# Altium PCB PCB1.PcbDoc (part 4 of 4)
Units mm, origin at the board's own origin, x right, y up, seen from the top; angles counter-clockwise.
Board outline 49 x 49 mm, 8 copper layers (L1(SIG), L2(GND), L3(SIG), L4(GND), L5(PWR), L6(PWR), L7(GND), L8(SIG)), stack 1.6 mm thick; 175 components, 123 nets, 646 pads, 355 vias.
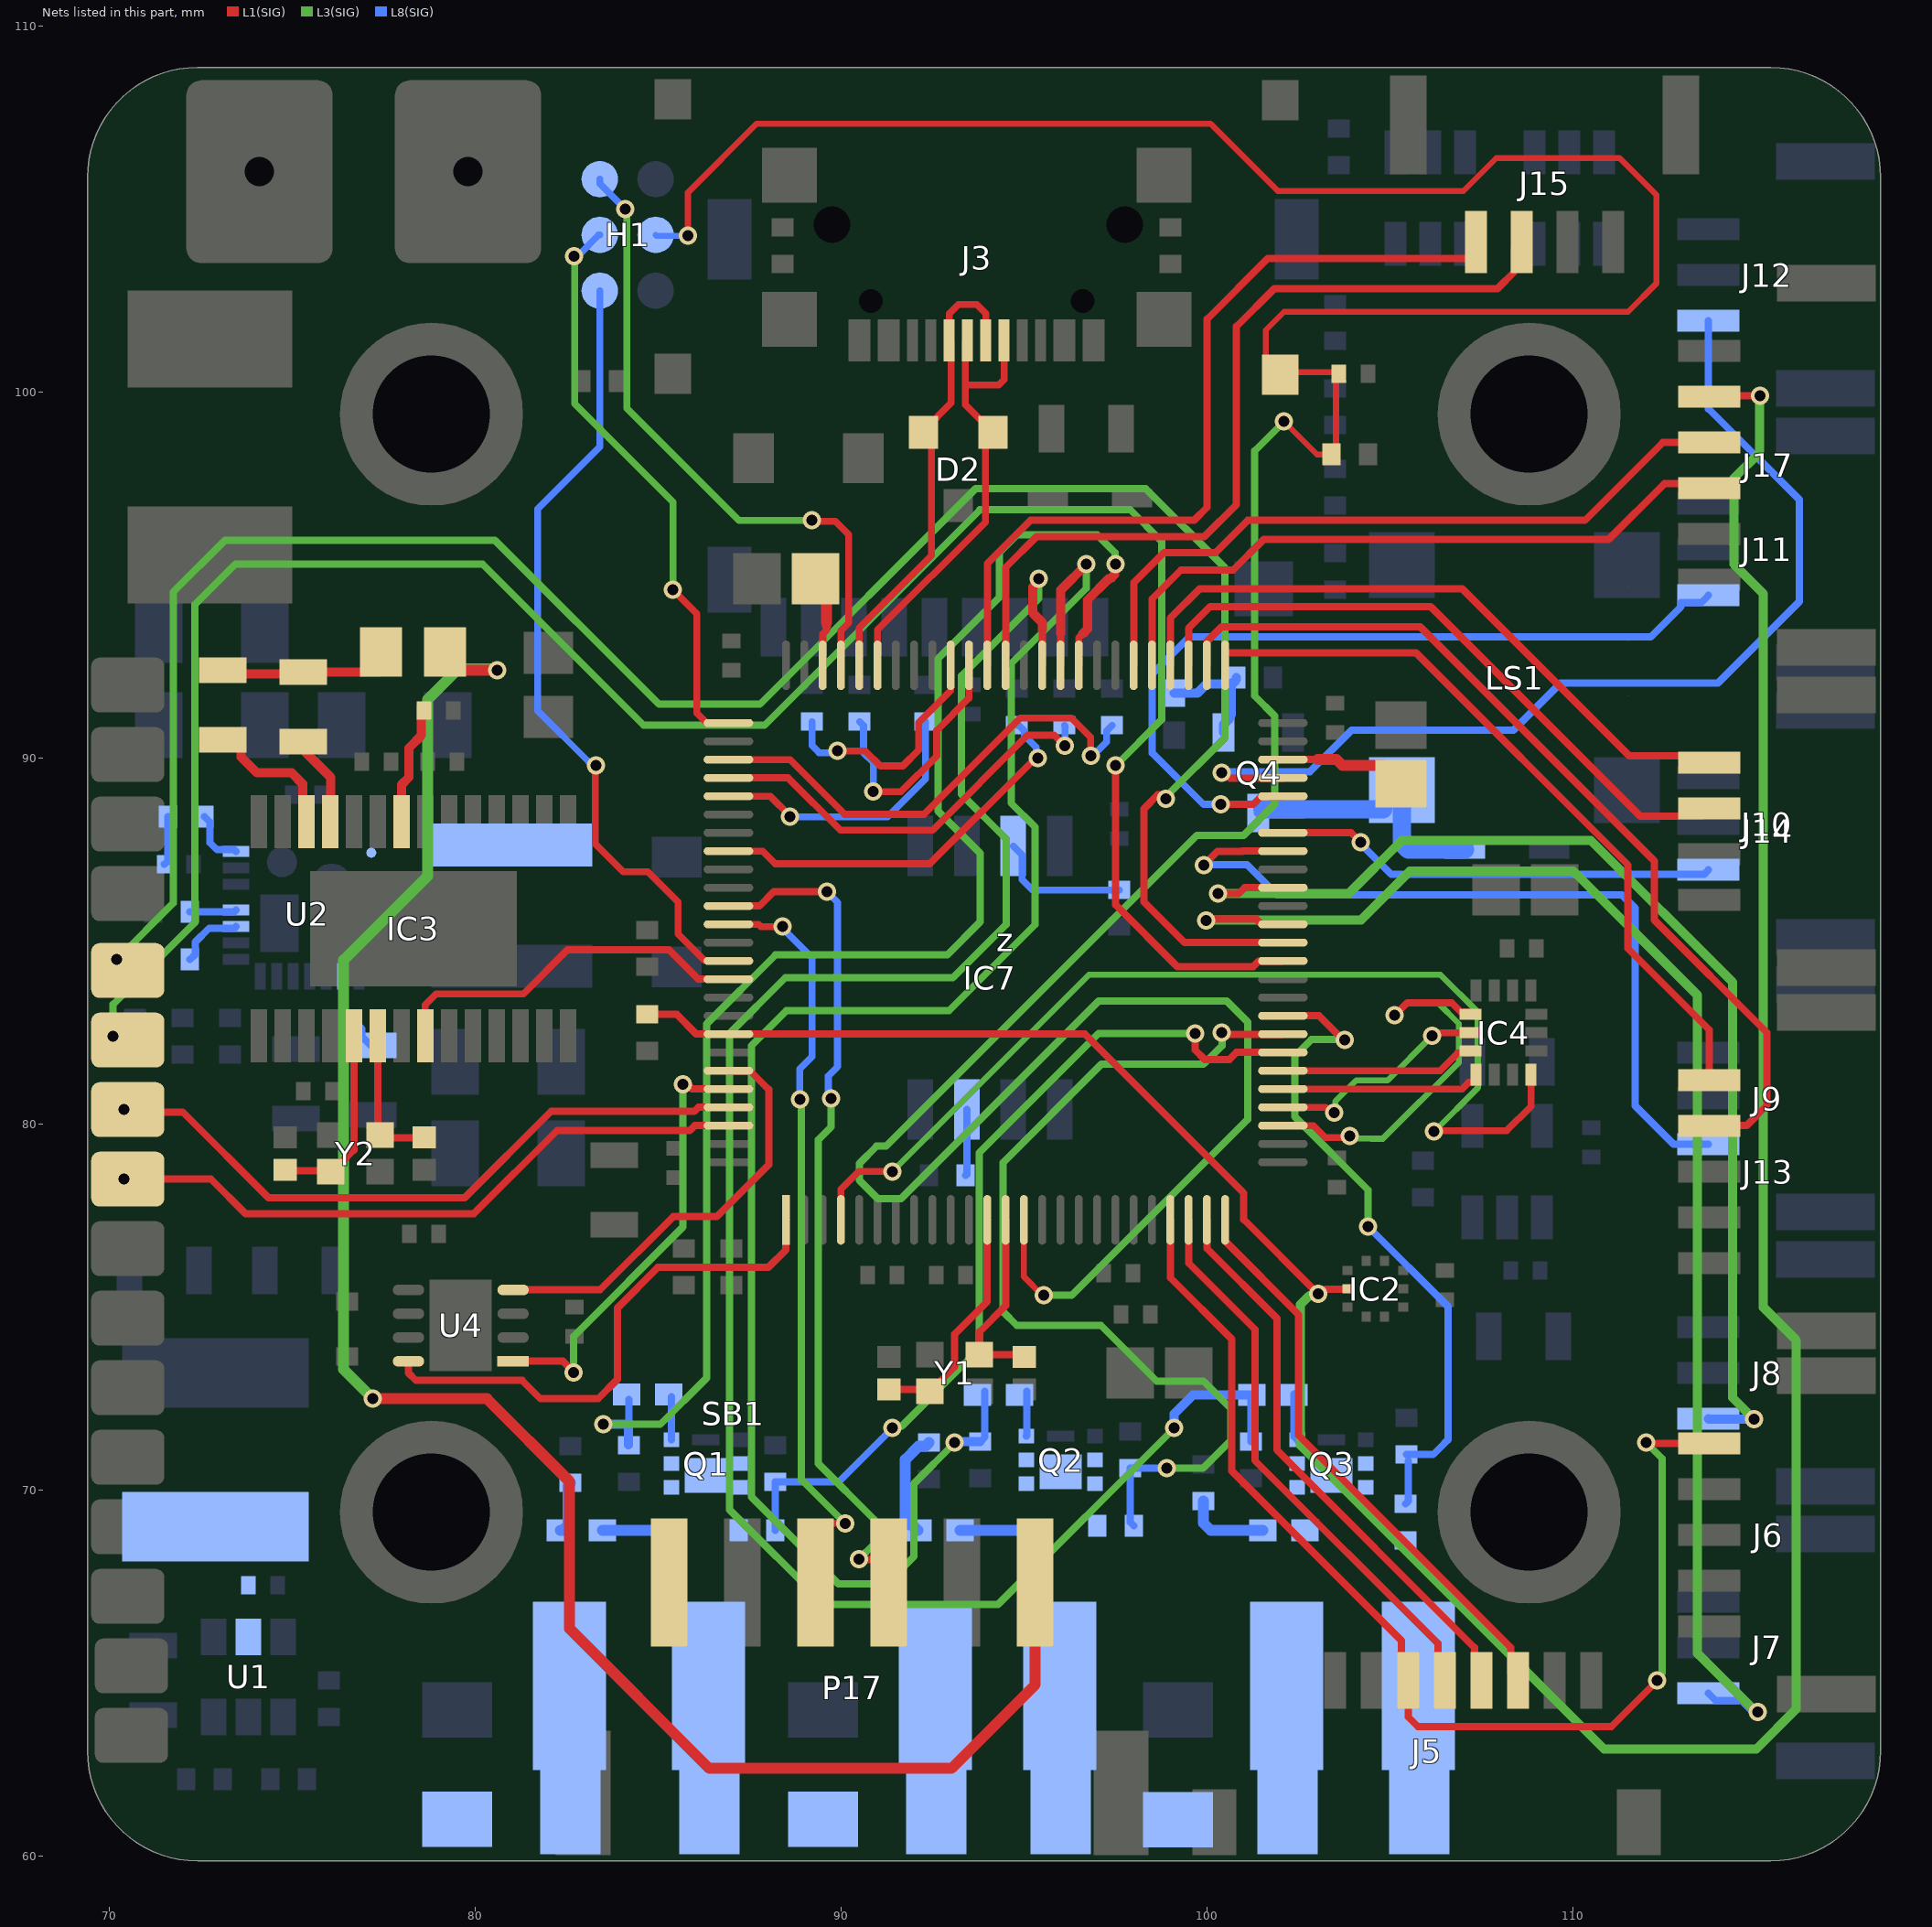
[diagram p9: the nets of this part, all layers, seen from the top]

## Via types
v1: diameter 0.5, hole 0.3, L1(SIG) to L8(SIG), tented both sides, 353 vias
v2: diameter 0.5, hole 0.3, L1(SIG) to L8(SIG), 2 vias

## Nets (pads, with @x,y where several pads share a name; then routed paths per layer and width w, separated by ;. In a path a pad name is that pad's centre, name@x,y a point inside that pad or via, vN(x,y) a via of type N, cw(c..) or ccw(c..) an arc to the next point about the centre after c; other vN are vias at no path point) (continued)
I2C_SDA: IC2.4 J17.5 R3.1 z.93 | length 82.9
  L1(SIG) w0.2: R3.1@84.7,83 85.504,83 86.036,82.469 86.33,82.469 86.332,82.466 86.907,82.466 86.911,82.463 96.657,82.463 101,78.119 101,77.397 v1(103.028,75.369) 103.109,75.369 103.228,75.488 IC2.4@103.826,75.488 ; J17.5@113.725,99.875 113.753,99.903 v1@115.098,99.903
  L3(SIG) w0.25: v1(103.028,75.369) 102.98,75.321 102.79,75.321 102.549,75.08 102.549,71.229 110.846,62.932 115.004,62.932 116.1,64.028 116.1,74.099 115.2,74.999 115.2,94.495 114.394,95.301 114.394,97.653 115.1,98.359 115.1,99.918 v1(115.107,99.911)
IMU_CS: IC4.12 z.28 | length 11.4
  L1(SIG) w0.192: z.28@102.065,79.964 102.069,79.96 102.902,79.96 103.226,79.637 103.862,79.637 v1(103.9,79.675) ; v1(105.125,82.975) 105.469,83.319 106.681,83.319 106.946,83.054 107.146,83.054 IC4.12@107.2,83
  L3(SIG) w0.167: v1(103.9,79.675) 103.964,79.611 104.488,79.611 104.491,79.608 104.798,79.608 106.876,81.685 106.876,82.749 106.297,83.328 105.478,83.328 v1(105.125,82.975)
IMU_INT1: IC4.4 z.4 | length 28.7
  L1(SIG) w0.192: z.4@89.99,77.389 89.99,78.224 90.479,78.713 91.387,78.713 v1(91.4,78.7) ; v1(106.2,79.8) 106.221,79.821 108.18,79.821 108.85,80.49 IC4.4@108.85,81.35
  L3(SIG) w0.167: v1(91.4,78.7) 91.4,78.715 96.771,84.087 106.373,84.087 107.396,83.063 107.396,80.996 v1(106.2,79.8)
IMU_MISO: IC4.1 z.30 | length 5
  L1(SIG) w0.192: z.30@102.642,80.964 106.964,80.964 107.146,81.146 107.296,81.146 107.35,81.2 IC4.1@107.35,81.35
IMU_MOSI: IC4.14 z.31 | length 5.4
  L1(SIG) w0.192: z.31@102.065,81.464 106.364,81.464 106.846,81.946 107.146,81.946 IC4.14@107.2,82
IMU_SCK: IC4.13 z.29 | length 6.3
  L1(SIG) w0.192: z.29@102.067,80.466 103.236,80.466 103.384,80.318 v1(103.467,80.318) ; v1(106.147,82.418) 106.231,82.418 106.312,82.5 IC4.13@107.2,82.5
  L3(SIG) w0.167: v1(103.467,80.318) 103.499,80.35 103.499,80.627 104.072,81.2 104.929,81.2 v1(106.147,82.418)
M1: J5.5 J6.5 z.22 | length 32.2
  L1(SIG) w0.2: z.22@98.99,77.389 98.99,75.81 100.67,74.13 100.67,70.527 105.306,65.892 105.306,64.994 J5.5@105.5,64.8 105.5,63.8 105.751,63.549 111.049,63.549 v1(112.3,64.8) ; v1(112,71.3) 112.025,71.275 J6.5@113.725,71.275
  L3(SIG) w0.2: v1(112,71.3) 112.428,70.872 112.428,65.009 112.3,64.881 v1(112.3,64.8)
M2: J5.6 z.23 | length 15.5
  L1(SIG) w0.2: z.23@99.49,77.389 99.49,76.21 101.303,74.397 101.303,70.814 106.304,65.813 106.304,64.996 J5.6@106.5,64.8
M3: J5.7 z.24 | length 15.7
  L1(SIG) w0.2: z.24@99.99,77.389 99.99,76.61 101.903,74.697 101.903,71.101 107.303,65.701 107.303,64.997 J5.7@107.5,64.8
M4: J5.8 z.25 | length 15.3
  L1(SIG) w0.2: z.25@100.492,76.802 102.5,74.795 102.5,71.5 108.301,65.699 108.301,64.999 J5.8@108.5,64.8
MODE1: R12.2 U2.21 | length 1.3
  L8(SIG) w0.2: R12.2@72.2,85.8 73.41,85.8 U2.21@73.46,85.85
MODE2: R14.2 U2.20 | length 1.8
  L8(SIG) w0.2: R14.2@72.2,84.5 72.345,84.645 72.345,84.978 72.726,85.359 73.419,85.359 U2.20@73.46,85.4
NetC22_1: C22.1 R9.2 | length 1.3
  L8(SIG) w0.2: C22.1@71.5,87.1 71.6,87.2 R9.2@71.6,88.4
NetC26_1: C26.1 z.48 | length 3.6
  L1(SIG) w0.2: z.48@102.065,89.964 103.014,89.964 103.025,89.975
  L1(SIG) w0.25: 103.025,89.975 103.125,89.975
  L1(SIG) w0.3: 103.014,89.964 103.536,89.964 103.7,89.8 104.8,89.8 C26.1@105.3,89.3
NetC27_2: C27.2 z.73 | length 2.4
  L1(SIG) w0.2: z.73@89.49,92.539 89.49,93.39 89.6,93.5 89.6,93.6
  L1(SIG) w0.25: 89.6,93.6 89.6,93.7
  L1(SIG) w0.3: 89.6,93.7 C27.2@89.6,94.9
NetC37_1: C37.1 C39.1 R23.1 | length 4.7
  L1(SIG) w0.25: C37.1@73.1,92.4 73.325,92.4 73.45,92.4 73.325,92.275 73.45,92.275 73.699,92.275 73.724,92.3 75.25,92.3 C39.1@75.3,92.35 77.375,92.35 R23.1@77.425,92.4
NetC37_2: C37.2 IC3.26 | length 3.9
  L1(SIG) w0.25: C37.2@73.1,90.5 73.371,90.5 73.596,90.275 73.596,90.035 73.695,89.936 74.031,89.6 74.98,89.6 75.278,89.302 75.278,88.369 IC3.26@75.376,88.271
NetC38_2: C38.2 IC3.22 | length 3.4
  L1(SIG) w0.25: IC3.22@77.976,88.271 77.976,89.276 78.182,89.482 78.182,90.284 78.525,90.626 C38.2@78.525,91.407
NetC39_2: C39.2 IC3.25 | length 2.2
  L1(SIG) w0.25: C39.2@75.325,90.2 76.041,89.484 IC3.25@76.041,88.286
NetC46_1: C46.1 IC3.5 Y2.3 | length 5.3
  L1(SIG) w0.2: C46.1@74.8,78.76 74.835,78.725 76.025,78.725 Y2.3@76.05,78.7 76.3,78.95 76.329,78.95 76.676,79.297 IC3.5@76.676,82.421
NetC47_1: C47.1 IC3.6 Y2.1 | length 4
  L1(SIG) w0.2: Y2.1@77.326,79.7 IC3.6@77.326,82.421 ; Y2.1@77.4,79.7 77.475,79.625 78.585,79.625 C47.1@78.6,79.64
NetD5_2: D5.2 R20.2 | length 2.3
  L8(SIG) w0.3: R20.2@99.9,69.7 99.9,69.1 100.1,68.9 D5.2@101.525,68.9
NetD6_2: D6.2 R18.2 | length 3
  L8(SIG) w0.3: D6.2@92.1,68.9 91.95,69.05 91.862,69.05 91.748,69.164 91.748,70.841 92.107,71.2 92.3,71.2 R18.2@92.4,71.3
NetD7_2: D7.2 R17.2 | length 1.4
  L8(SIG) w0.3: D7.2@82.325,68.9 82.377,68.9 82.527,69.05 82.527,70.127 R17.2@82.6,70.2
NetD8_2: D8.2 LS1.2 Q4.3 | length 6.7
  L8(SIG) w0.25: Q4.3@101.4,88.5 Q4.3@101.509,88.609
  L8(SIG) w0.5: Q4.3@101.509,88.609 LS1.2@104.809,88.609 ; LS1.2@105.325,89.125 105.325,87.675 105.5,87.5 D8.2@107.05,87.5
NetIC7_3: IC7.3 R40.2 | length 1.8
  L8(SIG) w0.2: R40.2@93.4,78.6 93.43,78.63 IC7.3@93.43,80.4
NetIC7_7: IC7.7 R24.2 | length 3.8
  L8(SIG) w0.192: IC7.7@94.7,87.6 94.941,87.359 94.941,86.686 95.227,86.4 R24.2@97.6,86.4
NetQ1_3: Q1.3 R31.2 | length 1.2
  L8(SIG) w0.2: Q1.3@85.362,71.375 R31.2@85.362,72.553
NetQ2_3: Q2.3 R32.2 | length 1.2
  L8(SIG) w0.2: Q2.3@95.062,71.475 95.075,71.488 R32.2@95.075,72.7
NetQ3_3: Q3.3 R33.2 | length 1.3
  L8(SIG) w0.2: R33.2@102.375,72.625 102.375,71.462 Q3.3@102.462,71.375
NetQ4_1: Q4.1 R42.2 R47.2 | length 3.3
  L8(SIG) w0.25: R47.2@99.1,91.775 99.727,91.775 99.977,92.025 100.675,92.025 100.8,92.15 R42.2@100.8,92.2 ; Q4.1@100.45,90.7 100.45,90.925 100.625,91.1 100.625,91.173 100.651,91.199 R42.2@100.651,92.051
NetU3_1: U4.8 z.1 | length 14.6
  L1(SIG) w0.2: U4.8@78.172,73.525 78.172,73.204 78.376,73 81.278,73 81.777,72.501 83.353,72.501 83.879,73.027 83.879,74.983 84.986,76.09 88.01,76.09 88.484,76.563 88.484,77.382 z.1@88.49,77.389
NetU3_95: U4.4 z.95 | length 11.8
  L1(SIG) w0.2: U4.4@81.028,75.475 83.403,75.476 85.403,77.476 86.595,77.476 88.013,78.895 88.013,80.951 87.503,81.462 86.917,81.462 z.95@86.915,81.464
NetU3_96: U4.1 z.96 | length 12.2
  L1(SIG) w0.2: U4.1@81.028,73.525 82.397,73.525 82.679,73.243 v1(82.679,73.218) ; v1(85.672,81.099) 85.729,81.042 85.844,81.042 85.922,80.964 z.96@86.915,80.964
  L3(SIG) w0.2: v1(82.679,73.218) 82.679,74.2 85.672,77.192 v1(85.672,81.099)
NRST: C31.2 H1.2 R1.2 S2.1 z.14 | length 104.1
  L1(SIG) w0.167: v1(85.808,104.275) 85.808,105.459 87.685,107.336 100.092,107.336 101.928,105.5 107,105.5 107.9,106.4 111.265,106.4 112.278,105.387 112.278,102.978 111.5,102.2 102.1,102.2 101.6,101.7 101.6,100.95 102,100.55 103.55,100.55 C31.2@103.6,100.5 103.521,100.421 103.521,98.421 R1.2@103.4,98.3 103,98.3 v1(102.1,99.2) ; z.14@94.99,77.389 94.99,75.834 95.499,75.325 v1(95.536,75.325)
  L3(SIG) w0.2: v1(95.536,75.325) 96.295,75.325 101.106,80.136 101.106,82.794 100.532,83.368 97.035,83.368 91.632,77.965 90.997,77.965 90.492,78.47 90.492,78.931 90.961,79.4 91.217,79.4 99.714,87.897 100.992,87.897 101.846,88.751 101.846,91.154 101.3,91.7 101.3,98.4 v1(102.1,99.2)
  L8(SIG) w0.167: H1.2@84.924,104.3 84.949,104.275 v1(85.808,104.275)
OSC_IN: C32.2 Y1.1 z.12 | length 6.5
  L1(SIG) w0.2: C32.2@91.3,72.76 92.365,72.76 Y1.1@92.425,72.7 92.45,72.7 92.7,72.95 92.7,72.975 93.097,73.372 93.097,74.262 93.988,75.153 93.988,77.386 z.12@93.99,77.389
OSC_OUT: C33.2 Y1.3 z.13 | length 5.2
  L1(SIG) w0.2: z.13@94.49,77.389 94.491,75.04 93.775,74.325 Y1.3@93.775,73.7 94.94,73.7 C33.2@95,73.64
OSD_CS: IC3.8 z.90 | length 10.1
  L1(SIG) w0.192: IC3.8@78.626,82.421 78.626,83.26 78.928,83.563 81.311,83.563 82.517,84.768 85.292,84.768 86.092,83.968 86.911,83.968 z.90@86.915,83.964
PHASE: R9.1 U2.24 | length 1.6
  L8(SIG) w0.2: R9.1@72.6,88.4 72.75,88.25 72.75,87.689 72.939,87.5 73.41,87.5 U2.24@73.46,87.45
PYRO_CH1: R31.1 R37.2 z.59 | length 42.5
  L1(SIG) w0.2: z.59@96.49,92.539 96.49,93.29 96.6,93.4 96.6,93.402
  L1(SIG) w0.25: 96.6,93.402 96.732,93.534 96.732,94.332 97.301,94.901 97.348,94.901 97.465,95.018 97.465,95.265 v1(97.5,95.3)
  L3(SIG) w0.2: v1(83.5,71.8) 85.05,71.8 86.316,73.066 86.316,82.744 88.199,84.626 92.893,84.626 93.798,85.531 93.798,87.402 92.643,88.557 92.643,92.722 94.324,94.404 94.324,95.624 94.8,96.1 96.994,96.1 97.481,95.613 97.481,95.319 v1(97.5,95.3)
  L8(SIG) w0.2: R37.2@84.2,71.225 R31.1@84.2,72.478
  L8(SIG) w0.25: v1(83.5,71.8) 84.193,71.8 ; R37.2@84.186,71.239 84.186,71.8
PYRO_CH1+: F1.2 J16.1 J16.2
PYRO_CH1-: D7.1 J20.1 J20.2 Q1.1 Q1.2 Q1.5 Q1.6 Q1.7 R34.2 | length 2.1
  L8(SIG) w0.3: D7.1@83.475,68.9 85.4,68.9 85.5,68.8
PYRO_CH1_CONT: R34.1 R41.2 z.32 | length 24
  L1(SIG) w0.2: v1(99.664,82.485) 99.664,82.035 99.931,81.769 100.603,81.769 100.798,81.964 z.32@102.065,81.964
  L3(SIG) w0.2: v1(91.4,71.7) 91.457,71.757 91.657,71.757 93.764,73.864 93.764,79.216 97.033,82.485 v1(99.664,82.485)
  L8(SIG) w0.2: R34.1@88.2,68.9 R41.2@88.2,70.225 89.925,70.225 v1(91.4,71.7)
PYRO_CH2: R32.1 R38.2 z.60 | length 46.9
  L1(SIG) w0.2: z.60@95.99,92.539 95.99,93.39 96,93.4
  L1(SIG) w0.25: 96,93.4 96,94.6 v1@96.691,95.291
  L3(SIG) w0.2: v1(93.1,71.3) 91.98,70.18 91.98,68.189 91.237,67.445 89.921,67.445 87.545,69.821 87.545,82.147 88.498,83.1 92.938,83.1 95.3,85.461 95.3,88.115 94.64,88.775 94.64,92.587 96.7,94.647 v1(96.7,95.3)
  L8(SIG) w0.2: R38.2@93.8,71.325 93.925,71.45 R32.1@93.925,72.7
  L8(SIG) w0.25: v1(93.1,71.3) 93.125,71.325 R38.2@93.8,71.325
PYRO_CH2+: F2.2 J18.1 J18.2
PYRO_CH2-: D6.1 J21.1 J21.2 Q2.1 Q2.2 Q2.5 Q2.6 Q2.7 R35.2 | length 1.9
  L8(SIG) w0.3: D6.1@93.25,68.9 94.9,68.9 95.1,68.7
PYRO_CH2_CONT: R35.1 R43.2 z.33 | length 26.3
  L1(SIG) w0.2: v1(100.4,82.5) 100.441,82.459 101.48,82.459 101.483,82.462 102.057,82.462 z.33@102.06,82.459
  L3(SIG) w0.2: v1(98.9,70.6) 99.885,70.6 100.64,71.354 100.64,72.242 99.897,72.985 98.615,72.985 97.1,74.5 94.8,74.5 94.418,74.882 94.418,78.951 97.107,81.64 99.9,81.64 100.403,82.143 100.403,82.497 v1(100.4,82.5)
  L8(SIG) w0.2: R35.1@98,69.025 97.9,69.125 R43.2@97.9,70.6 v1(98.9,70.6)
PYRO_CH3: R33.1 R39.2 z.61 | length 54.4
  L1(SIG) w0.2: z.61@95.492,92.543 z.61@95.492,93.122 ; z.61@95.493,93.123 95.493,93.493
  L1(SIG) w0.25: v1(95.4,94.9) 95.4,94.839 95.237,94.676 95.237,93.963 95.5,93.7 95.5,93.5
  L3(SIG) w0.2: v1(95.4,94.9) 95.4,94.369 93.281,92.25 93.281,89.019 94.503,87.797 94.503,85.457 93.046,84 88.466,84 86.948,82.482 86.948,69.469 89.538,66.879 94.279,66.879 v1(99.1,71.7)
  L8(SIG) w0.2: R39.2@101.2,71.325 R33.1@101.2,72.6
  L8(SIG) w0.25: v1(99.1,71.7) 99.1,72.094 99.606,72.6 R33.1@101.225,72.6
PYRO_CH3+: F3.2 J19.1 J19.2
PYRO_CH3-: D5.1 J22.1 J22.2 Q3.1 Q3.2 Q3.5 Q3.6 Q3.7 R36.2
PYRO_CH3_CONT: R36.1 R45.2 z.34 | length 18.2
  L1(SIG) w0.2: z.34@102.065,82.964 103.06,82.964 103.715,82.309 v1(103.754,82.309)
  L3(SIG) w0.2: v1(103.754,82.309) 103.749,82.314 102.844,82.314 102.393,81.863 102.393,80.208 104.4,78.201 v1(104.4,77.2)
  L8(SIG) w0.2: v1(104.4,77.2) 106.579,75.021 106.579,71.379 106.5,71.3 106.175,70.975 R45.2@105.45,70.975 ; R36.1@105.425,69.625 105.5,69.7 R45.2@105.5,70.8
SDIO_CLK: R51.2 z.80 | length 7.6
  L1(SIG) w0.192: z.80@86.915,88.963 88.057,88.963 88.6,88.42 v1(88.6,88.4)
  L8(SIG) w0.192: v1(88.6,88.4) 91.266,88.4 92.3,89.434 R51.2@92.3,91
SDIO_CMD: R52.2 z.83 | length 11
  L1(SIG) w0.192: z.83@86.915,87.464 87.848,87.464 88.192,87.12 92.42,87.12 95.309,90.009 v1(95.372,90.009)
  L8(SIG) w0.192: R52.2@94.8,90.9 94.85,90.9 95.004,90.746 95.004,90.619 95.326,90.297 95.326,90.055 v1(95.372,90.009)
SDIO_D0: R22.2 z.65 | length 7.1
  L1(SIG) w0.192: v1(90.864,89.087) 91.629,89.087 92.608,90.067 92.608,90.763 93.49,91.644 z.65@93.49,92.539
  L8(SIG) w0.192: R22.2@90.5,91 90.606,90.894 90.606,90.155 90.878,89.883 90.878,89.101 v1(90.864,89.087)
SDIO_D1: R25.2 z.66 | length 6.7
  L1(SIG) w0.192: v1(89.9,90.2) 90.653,90.2 91.059,89.793 91.682,89.793 92.112,90.223 92.112,90.972 92.986,91.847 92.986,92.536 z.66@92.99,92.539
  L8(SIG) w0.192: R25.2@89.2,91 89.2,90.345 89.397,90.148 89.848,90.148 v1(89.9,90.2)
SDIO_D2: R26.2 z.78 | length 13.4
  L1(SIG) w0.192: z.78@86.915,89.964 88.598,89.964 90.092,88.47 92.263,88.47 94.89,91.096 96.291,91.096 96.815,90.572 v1(96.815,90.066)
  L8(SIG) w0.192: v1(96.815,90.066) 96.866,90.066 97.247,90.447 97.247,90.747 R26.2@97.4,90.9
SDIO_D3: R50.2 z.79 | length 11.5
  L1(SIG) w0.192: z.79@86.917,89.467 88.544,89.467 89.972,88.038 92.499,88.038 95.093,90.632 95.817,90.632 v1(96.109,90.34)
  L8(SIG) w0.192: R50.2@96.1,90.9 96.109,90.891 v1(96.109,90.34)
SW_3V3: C15.1 L1.1 U1.5
SW_5V: L2.1 U2.5-6-7-8-9
SWCLK: H1.5 z.76 | length 15.8
  L1(SIG) w0.187: v1@85.4,94.597 86.048,93.949 86.048,91.236 86.315,90.969 86.91,90.969 z.76@86.915,90.964
  L3(SIG) w0.187: v1@82.709,103.707 82.709,99.691 85.4,97 v1(85.4,94.6)
  L8(SIG) w0.187: v1(82.698,103.717) 82.758,103.777 82.846,103.777 83.369,104.3 H1.5@83.4,104.3
SWDIO: H1.6 z.72 | length 17.7
  L1(SIG) w0.187: v1(89.2,96.5) 89.226,96.474 89.834,96.474 90.2,96.108 90.2,93.7 89.99,93.49 z.72@89.99,92.539
  L3(SIG) w0.187: v1(84.1,105) 84.142,104.958 84.142,99.558 87.2,96.5 v1(89.2,96.5)
  L8(SIG) w0.187: H1.6@83.4,105.824 83.4,105.7 v1(84.1,105)
SWO: H1.4 z.89 | length 22
  L1(SIG) w0.187: v1(83.3,89.8) 83.279,89.779 83.279,87.658 84.037,86.9 84.717,86.9 85.54,86.076 85.54,85.195 86.267,84.469 86.91,84.469 z.89@86.915,84.464
  L8(SIG) w0.187: v1(83.3,89.8) 83.215,89.8 83.098,89.918 83.082,89.918 81.7,91.3 81.7,96.811 83.4,98.511 H1.4@83.4,102.776
TIM1_CH1: J7.3 z.39 | length 39.4
  L1(SIG) w0.2: v1(99.965,85.572) 100.001,85.608 101.339,85.608 101.48,85.466 102.063,85.466 z.39@102.065,85.464
  L3(SIG) w0.25: v1@99.979,85.586 104.208,85.586 105.538,86.916 110.008,86.916 113.4,83.525 113.4,65.544 115.005,63.939 v1(115.04,63.939)
  L8(SIG) w0.2: J7.3@113.7,64.45 113.9,64.25 114.608,64.25 114.861,63.997 114.982,63.997 v1(115.04,63.939)
TIM1_CH2: J8.3 z.41 | length 31
  L1(SIG) w0.2: v1(100.3,86.3) 100.856,86.3 101.02,86.464 z.41@101.513,86.464
  L3(SIG) w0.25: v1(100.3,86.3) 103.861,86.3 105.319,87.758 110.482,87.758 114.354,83.886 114.354,72.531 v1(114.946,71.939)
  L8(SIG) w0.25: J8.3@113.7,71.95 113.711,71.939 v1(114.946,71.939)
TIM1_CH3: J9.3 z.43 | length 22.5
  L1(SIG) w0.2: v1(99.902,87.084) 100.279,87.461 100.961,87.461 ; 100.962,87.462 z.43@102.063,87.462
  L8(SIG) w0.2: v1(99.902,87.084) 99.915,87.097 101.084,87.097 101.911,86.27 111.33,86.27 111.693,85.907 111.693,80.507 112.746,79.454 113.696,79.454 J9.3@113.7,79.45
TIM1_CH4: J10.3 z.44 | length 12.2
  L1(SIG) w0.2: z.44@102.065,87.964 103.936,87.964 v1(104.2,87.7)
  L8(SIG) w0.2: v1(104.2,87.7) 104.2,87.657 105.026,86.831 113.581,86.831 J10.3@113.7,86.95
TIM2_CH3: J11.3 z.46 | length 22.6
  L1(SIG) w0.2: v1(100.37,88.739) 101.254,88.739 101.477,88.962 102.063,88.962 z.46@102.065,88.964
  L8(SIG) w0.2: v1(100.37,88.739) 99.903,88.739 98.5,90.142 98.5,92.306 99.506,93.312 112.117,93.312 112.95,94.145 112.95,94.25 113.5,94.25 J11.3@113.7,94.45
TIM2_CH4: J12.3 z.47 | length 28.1
  L1(SIG) w0.2: v1(100.4,89.6) 100.481,89.6 100.619,89.462 z.47@102.068,89.462
  L8(SIG) w0.2: v1(100.4,89.6) 100.437,89.637 102.81,89.637 103.943,90.77 108.37,90.77 109.655,92.055 113.955,92.055 116.184,94.284 116.184,97.065 113.7,99.549 J12.3@113.7,101.95
UART1_RX: J14.4 z.54 | length 18.3
  L1(SIG) w0.2: z.54@98.99,92.539 98.99,93.829 99.791,94.63 106.97,94.63 111.531,90.069 113.531,90.069 J14.4@113.725,89.875
UART1_TX: J14.3 z.53 | length 18
  L1(SIG) w0.2: z.53@99.49,92.539 99.49,93.558 100.077,94.145 106.107,94.145 111.831,88.421 112.89,88.421 112.894,88.425 113.525,88.425 J14.3@113.725,88.625
UART2_RX: P17.3 z.87 | length 21
  L1(SIG) w0.192: z.87@86.915,85.464 87.736,85.464 87.8,85.4 v1(88.4,85.4) ; P17.3@89.3,67.475 89.628,67.803 89.628,69.02 89.704,69.096 v1(90.102,69.096)
  L3(SIG) w0.192: v1(88.875,80.675) 88.909,80.641 88.909,70.289 v1(90.102,69.096)
  L8(SIG) w0.192: v1(88.4,85.4) 88.4,85.346 89.2,84.546 89.2,81.846 88.862,81.508 88.862,80.688 v1(88.875,80.675)
UART2_TX: P17.4 z.86 | length 23.5
  L1(SIG) w0.2: z.86@86.915,85.964 87.763,85.964 88.152,86.353 v1(89.609,86.353) ; v1(90.48,68.117) 90.498,68.1 90.95,68.1 91.3,67.75 P17.4@91.3,67.475
  L3(SIG) w0.2: v1(89.719,80.706) 89.719,79.926 89.367,79.575 89.367,70.733 90.9,69.2 90.9,68.537 v1(90.48,68.117)
  L8(SIG) w0.2: v1(89.609,86.353) 89.9,86.062 89.9,81.575 89.648,81.324 89.648,80.94 89.662,80.927 89.662,80.763 v1(89.719,80.706)
UART3_RX: J17.4 z.56 | length 19.6
  L1(SIG) w0.2: z.56@97.99,92.539 97.99,93.114 98,93.124 98,94.803 98.821,95.624 100.233,95.624 101.108,96.5 110.325,96.5 112.45,98.625 J17.4@113.725,98.625
UART3_TX: J17.3 z.55 | length 18.4
  L1(SIG) w0.2: z.55@98.49,92.539 98.49,94.352 99.278,95.139 100.702,95.139 101.542,95.979 110.972,95.979 112.494,97.501 113.599,97.501 J17.3@113.725,97.375
UART5_RX: J13.5 z.51 | length 20.6
  L1(SIG) w0.2: z.51@100.49,92.539 100.49,92.876 100.496,92.881 105.705,92.881 111.5,87.086 111.5,84.8 113.725,82.575 J13.5@113.725,81.2
UART5_TX: J13.4 z.52 | length 25.5
  L1(SIG) w0.2: z.52@99.99,92.539 99.992,92.542 99.992,93.192 100.396,93.596 105.818,93.596 112.219,87.195 112.219,85.581 115.3,82.5 115.3,80.526 114.741,79.967 113.742,79.967 J13.4@113.725,79.95
UART6_RX: J15.4 z.64 | length 22.9
  L1(SIG) w0.2: z.64@93.99,92.539 93.991,95.324 95.175,96.507 99.646,96.507 100,96.862 100,102 101.652,103.652 107.15,103.652 107.35,103.852 J15.4@107.35,104.1
UART6_TX: J15.3 z.63 | length 23.7
  L1(SIG) w0.2: z.63@94.49,92.539 94.49,93.114 94.5,93.124 94.5,95.223 95.329,96.052 99.92,96.052 100.8,96.932 100.8,101.8 101.832,102.832 107.932,102.832 108.4,103.3 108.4,103.9 J15.3@108.6,104.1
UART7_RX: P8.1 z.37 | length 60
  L1(SIG) w0.2: v1(97.5,89.8) 97.5,85.992 99.185,84.308 101.253,84.308 101.407,84.462 102.063,84.462 z.37@102.065,84.464
  L3(SIG) w0.2: v1(70.1,82.4) 70.1,83.275 72.335,85.51 72.335,94.201 73.445,95.311 80.189,95.311 84.6,90.9 87.9,90.9 93.787,96.787 97.898,96.787 98.753,95.933 98.753,91.053 v1(97.5,89.8)
UART7_TX: P2.1 z.38 | length 59.8
  L1(SIG) w0.2: v1(98.869,88.899) 98.787,88.899 98.686,89 98.647,89 98.266,88.619 98.266,86.076 99.377,84.965 z.38@102.065,84.965
  L3(SIG) w0.2: v1(70.2,84.5) 71.74,86.04 71.74,94.54 73.157,95.957 80.534,95.957 85.017,91.475 87.775,91.475 93.668,97.368 98.316,97.368 100.479,95.205 100.479,90.558 98.869,88.947 v1(98.869,88.899)
UART8_RX: P16.1 z.97 | length 18.5
  L1(SIG) w0.2: v1(70.4,80.4) 70.464,80.336 71.999,80.336 74.341,77.994 79.709,77.994 82.065,80.35 85.978,80.35 86.093,80.464 z.97@86.915,80.464
UART8_TX: P14.1 z.98 | length 17.9
  L1(SIG) w0.2: v1(70.4,78.5) 72.775,78.5 73.723,77.552 79.952,77.552 82.226,79.826 85.858,79.826 85.996,79.964 z.98@86.915,79.964
USB_D_N: D2.1 J3.A7 J3.B7 z.70 | length 12.7
  L1(SIG) w0.187: z.70@90.99,92.539 90.989,93.51 93.933,96.454 93.933,98.683 D2.1@94.15,98.9 94.15,98.95 93.844,99.256 93.794,99.256 93.394,99.656 93.394,100.2 ; J3.A7@93.45,101.422 93.394,101.366 93.394,100.2 ; J3.B7@94.45,101.422 94.45,100.35 94.3,100.2 93.394,100.2
USB_D_P: D2.2 J3.A6 J3.B6 z.71 | length 12.7
  L1(SIG) w0.187: z.71@90.49,92.539 90.49,93.559 92.468,95.537 92.468,98.682 D2.2@92.25,98.9 ; D2.2@92.25,98.95 93.006,99.706 93.006,100.86 93.006,101.366 J3.B6@92.95,101.422 92.95,102.15 93.2,102.4 93.7,102.4 93.95,102.15 J3.A6@93.95,101.422
VDRV: C16.2 U2.12 | length 2.3
  L8(SIG) w0.2: U2.12@76.372,84.038 76.372,83.128 76.896,82.604 76.896,82.4 77.146,82.15 C16.2@77.2,82.15
VIDEO_OUT: P17.6 R23.2 | length 52.7
  L1(SIG) w0.3: v1(77.2,72.5) 80.314,72.5 82.571,70.244 82.571,66.221 86.391,62.4 93.011,62.4 95.3,64.689 P17.6@95.3,67.475 ; R23.2@79.175,92.9 79.175,92.825 79.6,92.4 v1(80.6,92.4)
  L3(SIG) w0.3: v1(77.2,72.5) 76.4,73.3 76.4,84.489 78.697,86.786 78.697,91.609 79.529,92.44 80.418,92.44 80.42,92.438 80.562,92.438 v1(80.6,92.4)
VTX_VIN: P17.1 SB1.2
pads on no net: IC1.4 IC2.5 IC2.6 IC2.7 IC3.1 IC3.2 IC3.7 IC3.12 IC3.13 IC3.14 IC3.15 IC3.16 IC3.17 IC3.18 IC3.27 IC3.28 IC4.3 IC4.10 IC4.11 IC5.2 IC5.6 IC6.2 IC6.4 J3.A8 J3.B8 J3.MH1 J3.MH2 J3.MP1 J3.MP2 J3.MP3 J3.MP4 J4.13 J4.14 J4.CD1 J5.11 J5.12 J6.6 J6.7 J13.6 J13.7 J14.5 J14.6 J15.5 J15.6 J17.7 J17.8 LS1.3 LS1.4 P17.MP1 P17.MP2 U2.10 U2.11 U2.14 U2.28 Y1.2 Y1.4 Y2.2 Y2.4 z.2 z.5 z.7 z.8 z.9 z.36 z.40 z.42 z.45 z.57 z.58 z.62 z.67 z.69 z.77 z.82 z.84 z.85 z.88 z.91

## Polygon pours and split planes (outlines as drawn)
+3V3_IMU on L1(SIG) "+3V3_IMU_L01_P105" (solid, pour order 105): 108.7,83.356 108.7,85.5 108.856,85.656 108.856,87.2 111,87.2 111,83.356
+3V3 on L1(SIG) "+3V3_L01_P117" (solid, pour order 117): 69.7,73.275 69.7,70.45 75.65,70.45 75.65,73.275
+VBATT on L1(SIG) "+VBATT_L01_P116" (solid, pour order 116): 69.5,92.8 69.5,89.3 71.6,89.3 71.6,91.1 74.4,91.1 74.4,91.8 71.6,91.8 71.6,92.8
+5V on L1(SIG) "+5V_L01_P112" (solid, pour order 112): 88.5,98.9 82.4,98.9 82.4,94.3 83.9,94.3 86.1,96.5 88.5,96.5
+5VUSB on L1(SIG) "+5VUSB_L01_P071" (solid, pour order 71): 96.4,102.1 96.4,100.6 96.4,96.85 95.1,96.85 95.1,100.6 95.8,100.6 95.8,102.1
GND on L1(SIG) "3" (solid, pour order 74): 96.6,102 96.6,96.854 99.6,96.854 99.6,102
+5V on L1(SIG) "+5V_L01_P111" (solid, pour order 111): 114.6,75.7 109.6,75.7 109.6,78 110.6,78 110.6,76.5 114.6,76.5
GND on L1(SIG) "GND_L01_P109" (solid, pour order 109): 108.5,87.1 108.5,85.6 108.5,84 108.5,83.1 108.2,83.1 108.2,84 108.1,84.1 107,84.1 107,87.1
GND on L1(SIG) "GND_L01_P103" (solid, pour order 103): 107,81.3 109.255,81.3 109.255,84 107,84 107,83.9 107,84 107,83.9
GND on L1(SIG) "GND_L01_P099" (solid, pour order 99): 73.9,86.9 73.9,83.8 76.5,83.8 76.5,86.9
+VBATT on L1(SIG) "+VBATT_L01_P094" (solid, pour order 94): 101.9,65.6 97.8,65.6 97.8,64.2 99.7,64.2 99.7,63.2 101.9,63.2
+VBATT on L1(SIG) "+VBATT_L01_P093" (solid, pour order 93): 109,64 109,67.5 112.2,67.5 112.2,66.9 114.7,66.9 114.7,65.8 110,65.8 110,64
VTX_VIN on L1(SIG) "VTX_VIN_L01_P091" (solid, pour order 91): 86.2,72.9 87.8,72.9 87.8,69.6 86.3,69.6 86.3,65.6 84.4,65.6 84.4,71.129 86.2,71.129
+VBATT on L1(SIG) "+VBATT_L01_P090" (solid, pour order 90): 87.9,71.3 87.9,74.8 89.7,74.8 89.7,71.3
+5VBUCK on L1(SIG) "+5VBUCK_L01_P089" (solid, pour order 89): 86.1,74.8 86.1,71.3 84.3,71.3 84.3,74.8
GND on L1(SIG) "GND_L01_P076" (solid, pour order 76): 69.4,98.8 75.2,98.8 75.2,94.2 69.4,94.2
+VBATT on L1(SIG) "+VBATT_L01_P075" (solid, pour order 75): 76.1,108.9 76.1,100 69.3,100 69.3,108.9
GND on L1(SIG) "GND_L01_P073" (solid, pour order 73): 90.8,99.2 87.3,99.2 87.3,102 90.8,102 90.8,101.9
+5VUSB on L1(SIG) "+5VUSB_L01_P072" (solid, pour order 72): 91,102.1 91.6,102.1 91.6,99.7 91.3,99.4 91.3,97.3 89.5,97.3 89.5,99.1 90.4,100 91,100.6
+5V on L5(PWR) "\" (solid, pour order 66): 86,96.6 69.4,96.6 69.4,59.875 118,59.875 118,107 108,107 108,103 113,103 113,62.6 73.2,62.6 73.2,91.1 76.1,94 86,94
+3V3 on L5(PWR) "+3V3_L05_P069" (solid, pour order 69): 69.3,108.8 69.3,59.9 118.5,59.9 118.5,108.8
+5V on L5(PWR) "+5V_L05_P065" (solid, pour order 65): 114.3,78 108.6,78 108.6,75.5 114.3,75.5
+VBATT on L6(PWR) "+VBATT_L06_P067" (solid, pour order 67): 77,109 77,78 82,73 112.9,73 112.9,59.875 69,59.875 69,109
+5VBUCK on L6(PWR) "+5VBUCK_L06_P092" (solid, pour order 92): 69,109 69,60 119,60 119,109
+VBATT on L6(PWR) "+VBATT_L06_P070" (solid, pour order 70): 90.2,75 87.5,75 87.5,72.5 90.2,72.5
GND on L8(SIG) "GND_L08_P115" (solid, pour order 115): 72.4,98.6 72.4,89.7 69.4,89.7 69.4,98.6
+5VUSB on L8(SIG) "+5VUSB_L08_P114" (solid, pour order 114): 96.4,99.3 90.4,99.3 90.4,100.9 96.4,100.9
+5V on L8(SIG) "+5V_L08_P113" (solid, pour order 113): 84.3,86.4 86.2,86.4 86.2,92.086 84.6,93.5 84.6,96 82.4,96 82.4,92.865 84.3,91.25
+3V3 on L8(SIG) "+3V3_L08_P110" (solid, pour order 110): 71.8,76.7 71.8,73.7 75.1,73.7 75.1,76.7 71.9,76.7
PYRO_CH2- on L8(SIG) "PYRO_CH2-_L08_P084" (solid, pour order 84): 94.6,71.1 94.6,59.9 97.3,59.9 97.3,71.1
PYRO_CH1- on L8(SIG) "PYRO_CH1-_L08_P085" (solid, pour order 85): 87.7,71 84.9,71 84.9,59.9 87.7,59.9
GND on L8(SIG) "GND_L08_P096" (solid, pour order 96): 95.5,71.3 98.5,71.3 98.5,74.1 95.5,74.1
GND on L8(SIG) "GND_L08_P108" (solid, pour order 108): 108.5,85.9 108.5,81 106.9,81 106.9,85.9
GND on L8(SIG) "GND_L08_P107" (solid, pour order 107): 107.9,78.1 107.9,76.8 107.8,76.7 107.2,76.7 107.2,73.4 108.5,73.4 108.5,78.1
+3V3_IMU on L8(SIG) "+3V3_IMU_L08_P106" (solid, pour order 106): 111.2,85.9 111.2,79.6 110,79.6 109.6,79.2 108.8,79.2 108.8,85.9
+5V on L8(SIG) "+5V_L08_P104" (solid, pour order 104): 108.8,78.1 108.8,73.4 110.6,73.4 110.6,78.1
+VBATT on L8(SIG) "+VBATT_L08_P079" (solid, pour order 79): 74,86.3 73,86.3 73,86.7 73.9,86.7 73.9,89.5 72.8,90.6 72.8,99.1 69.4,99.1 69.4,109.2 76.6,109.2 76.6,96.1 76.6,89.8 75.3,89.8 75.3,86.5 74,86.5 75.3,86.5 74,86.5
GND on L8(SIG) "GND_L08_P102" (solid, pour order 102): 73.2,65.4 73.2,66.8 69.9,66.8 69.9,65.4
SW_3V3 on L8(SIG) "SW_3V3_L08_P101" (solid, pour order 101): 74.2,65.5 74.2,70 72.5,70 72.5,67 73.4,67 73.4,65.5
+5V on L8(SIG) "+5V_L08_P100" (solid, pour order 100): 73.2,62.8 69.5,62.8 69.5,65 73.2,65
+5VBUCK on L8(SIG) "+5VBUCK_L08_P098" (solid, pour order 98): 78.8,83.2 81.7,83.2 81.7,78.3 84.6,78.3 84.6,83.3 86.4,83.3 86.4,86 78.8,86 78.8,85
GND on L8(SIG) "GND_L08_P097" (solid, pour order 97): 85.9,71.2 85.9,74.8 90.6,74.8 90.6,71.2
GND on L8(SIG) "GND_L08_P095" (solid, pour order 95): 103,71.2 103,74.2 106,74.2 106,71.2
+VBATT on L8(SIG) "+VBATT_L08_P088" (solid, pour order 88): 101.1,63.1 101.1,65.6 97.6,65.6 97.6,63.1
+VBATT on L8(SIG) "+VBATT_L08_P087" (solid, pour order 87): 81.4,63 77.6,63 77.6,65.5 81.4,65.5
PYRO_CH1+ on L8(SIG) "PYRO_CH1+_L08_P083" (solid, pour order 83): 78.5,62.8 78.5,59.8 83.6,59.8 83.6,67 81.4,67 81.4,62.8
+VBATT on L8(SIG) "+VBATT_L08_P086" (solid, pour order 86): 87.7,65.4 87.7,63 91.3,63 91.3,65.4
PYRO_CH2+ on L8(SIG) "PYRO_CH2+_L08_P082" (solid, pour order 82): 88.4,62.8 88.4,59.9 93.551,59.9 93.551,67.1 91.4,67.1 91.4,62.8
PYRO_CH3+ on L8(SIG) "PYRO_CH3+_L08_P081" (solid, pour order 81): 103.2,67 103.2,60.1 98,60.1 98,62.9 101.1,62.9 101.1,67
PYRO_CH3- on L8(SIG) "PYRO_CH3-_L08_P080" (solid, pour order 80): 103.9,59.8 103.8,67 102.1,68.479 102.1,71 104.8,71 104.8,69.3 107.7,69.3 107.7,59.8
SW_5V on L8(SIG) "SW_5V_L08_P078" (solid, pour order 78): 76.9,85.2 76.9,89.2 83.3,89.2 83.3,86.7 78.9,86.7 78.5,86.3 78.5,85.2
GND on L8(SIG) "GND_L08_P077" (solid, pour order 77): 76.7,88.3 76.7,84.6 74.1,84.6 74.1,88.3
GND on L7(GND) "GND_L07_P064" (solid, pour order 64): 69.3,108.8 69.3,59.9 118.5,59.9 118.5,108.8
GND on L4(GND) "GND_L04_P063" (solid, pour order 63): 69.3,59.9 118.5,59.9 118.5,108.8 69.3,108.8
GND on L2(GND) "GND_L02_P062" (solid, pour order 62): 69.3,108.8 69.4,108.7 69.4,59.9 118.5,59.9 118.5,108.8

## Silkscreen, mask and mechanical layers (free items; w line width, h text height)
Top Overlay:
  circle w0.2: c73.6,81.5 r0.1
  lines w0.16: 70.615,93.206 70.904,93.494 70.504,93.494 70.815,93.806 ; 71.582,93.217 71.882,93.217 71.882,93.717 71.582,93.717 ; 88.659,73.61 88.948,73.898 88.548,73.898 88.859,74.21 ; 89.626,73.621 89.926,73.621 89.926,74.121 89.626,74.121 ; 69.818,93 69.818,94.008 71.582,94.008 71.582,93 69.818,93 ; 87.862,73.364 89.626,73.364 89.626,74.464 87.862,74.464 87.862,73.364
  lines w0.2: 69.9,105.7 70.7,105.7 71.5,105.7 ; 70.7,104.8 70.7,106.6 ; 82,105.7 83.2,105.7
  text "GPS" at 114.66,104.06 h1
  text "GND" at 78.26,102.26 h1
  text "R6" at 105.56,102.16 h0.9
  text "T6" at 107.66,102.16 h0.9
  text "G" at 109.66,102.16 h0.9
  text "5V" at 110.743,102.124 h0.9
  text "D" at 111.765,100.817 h1
  text "C" at 111.757,99.54 h1
  text "R" at 111.76,98.26 h1
  text "RST" at 99.725,98.25 h1.5
  text "BOOT0" at 82.053,97.95 h1.5
  text "T" at 111.76,96.96 h1
  text "G" at 111.681,95.676 h1
  text "5V" at 108.46,94.16 h1
  text "STM32H743" at 91.067,93.498 h1.2
  text "V_GPS" at 105.56,92.793 h1
  text "3V3" at 107.76,91.26 h1
  text "RX1" at 110.06,89.46 h1
  text "TX1" at 110.16,88.06 h1
  text "G" at 71.86,87.76 h1
  text "G" at 111.66,86.76 h1
  text "G" at 71.96,85.76 h1
  text "5V" at 110.86,85.46 h1
  text "T7" at 71.76,83.66 h1
  text "R7" at 71.76,81.86 h1
  text "RX5" at 109.76,80.86 h1
  text "OSD" at 79.691,79.998 h1.2
  text "R8" at 71.86,79.86 h1
  text "TX5" at 109.76,79.56 h1
  text "IMU" at 106.631,79.198 h1.2
  text "CAM" at 109.66,78.26 h1
  text "T8" at 71.86,77.96 h1
  text "GND" at 109.66,76.96 h1
  text "CAN" at 79.646,76.398 h1.2
  text "CANL" at 71.86,76.06 h1
  text "5V" at 110.26,75.66 h1
  text "CANH" at 71.86,74.26 h1
  text "5V" at 84.46,73.36 h1
  text "BARO" at 103.016,72.898 h1.2
  text "3V3" at 71.86,72.26 h1
  text "Vid" at 94.361,70.936 h1
  text "3V3" at 71.86,70.36 h1
  text "V" at 84.86,69.66 h1
  text "G" at 86.86,69.66 h1
  text "R" at 88.86,69.66 h1
  text "T" at 90.96,69.66 h1
  text "G" at 92.66,69.66 h1
  text "OUT" at 94.16,69.66 h1
  text "GND" at 71.86,68.56 h1
  text "VTX" at 81.66,68.16 h1
  text "GND" at 71.86,66.66 h1
  text "Quad ESC" at 100.081,66.202 h1
  text "5V" at 71.96,64.66 h1
  text "5V" at 71.96,62.76 h1
  text "Single" at 113.46,62.593 h1
  text "ESC" at 114.36,60.96 h1
Bottom Overlay:
  drawing of 22 lines, arcs and shapes, not listed
  text "S6" at 113.64,105.56 h1
  text "SWD" at 74.449,101.275 h1.2
  text "SWD" at 86.069,100.498 h1.2
  text "IO" at 71.938,99.6 h1
  text "3V" at 74.636,99.5 h1
  text "S5" at 113.64,98.16 h1
  text "CK" at 72.235,97.503 h1
  text "RS" at 74.626,97.5 h1
  text "SW" at 72.331,95.5 h1
  text "G" at 74.228,95.5 h1
  text "S4" at 113.64,90.76 h1
  text "Buzzer" at 111.138,85.098 h1.2
  text "S3" at 113.64,83.16 h1
  text "IMU 3V3" at 105.102,81.338 h1.2 r90
  text "NOR FLASH" at 88.664,81.162 h1.2 r270
  text "+5V BUCK" at 83.898,77.962 h1.2 r270
  text "S2" at 113.64,75.66 h1
  text "Omnifly H7" at 101.8,75.111 h3
  text "Pyro CH1" at 87.538,73.498 h1.2
  text "Pyro CH3" at 106.338,73.498 h1.2
  text "Pyro CH2" at 97.438,73.398 h1.2
  text "S1" at 113.64,68.26 h1
  text "3V3 Buck" at 76.698,61.362 h1.2 r270
Mechanical 13:
  lines w0.2: 78.8,99.4 78.9,99.4 108.8,69.5 ; 79.4,69.4 109.4,99.4 ; 93.85,84.45 109.85,84.45